# Altium PCB Evaluation_PCB.PcbDoc
Units mm, origin at the board's own origin, x right, y up, seen from the top; angles counter-clockwise.
Board outline 50 x 50 mm, 2 copper layers (Top Layer, Bottom Layer); 22 components, 13 nets, 51 pads, 0 vias.
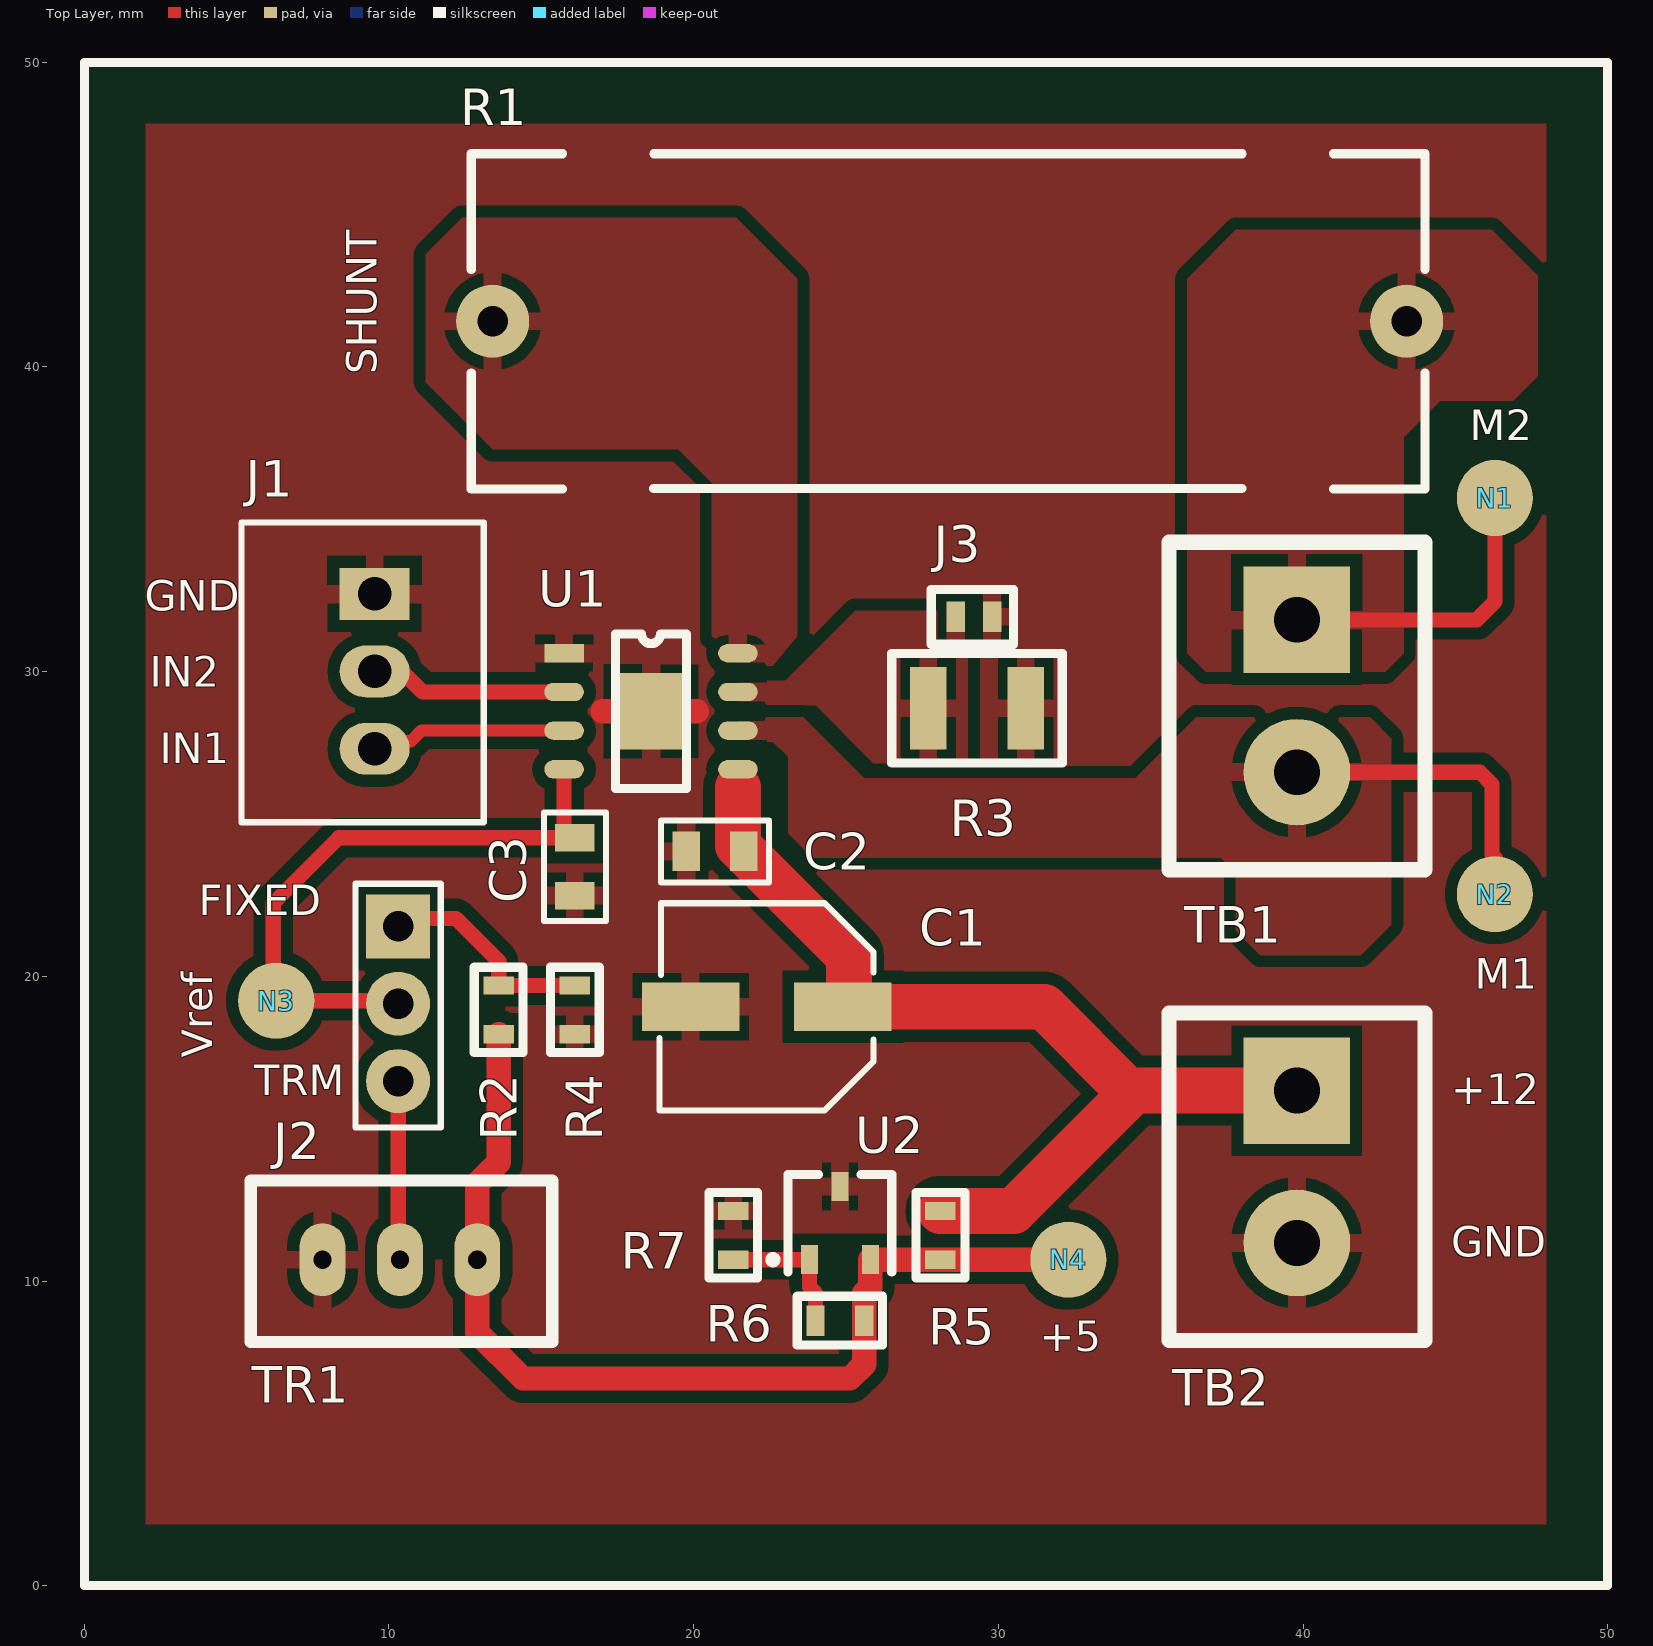
[diagram p0: Top Layer view]
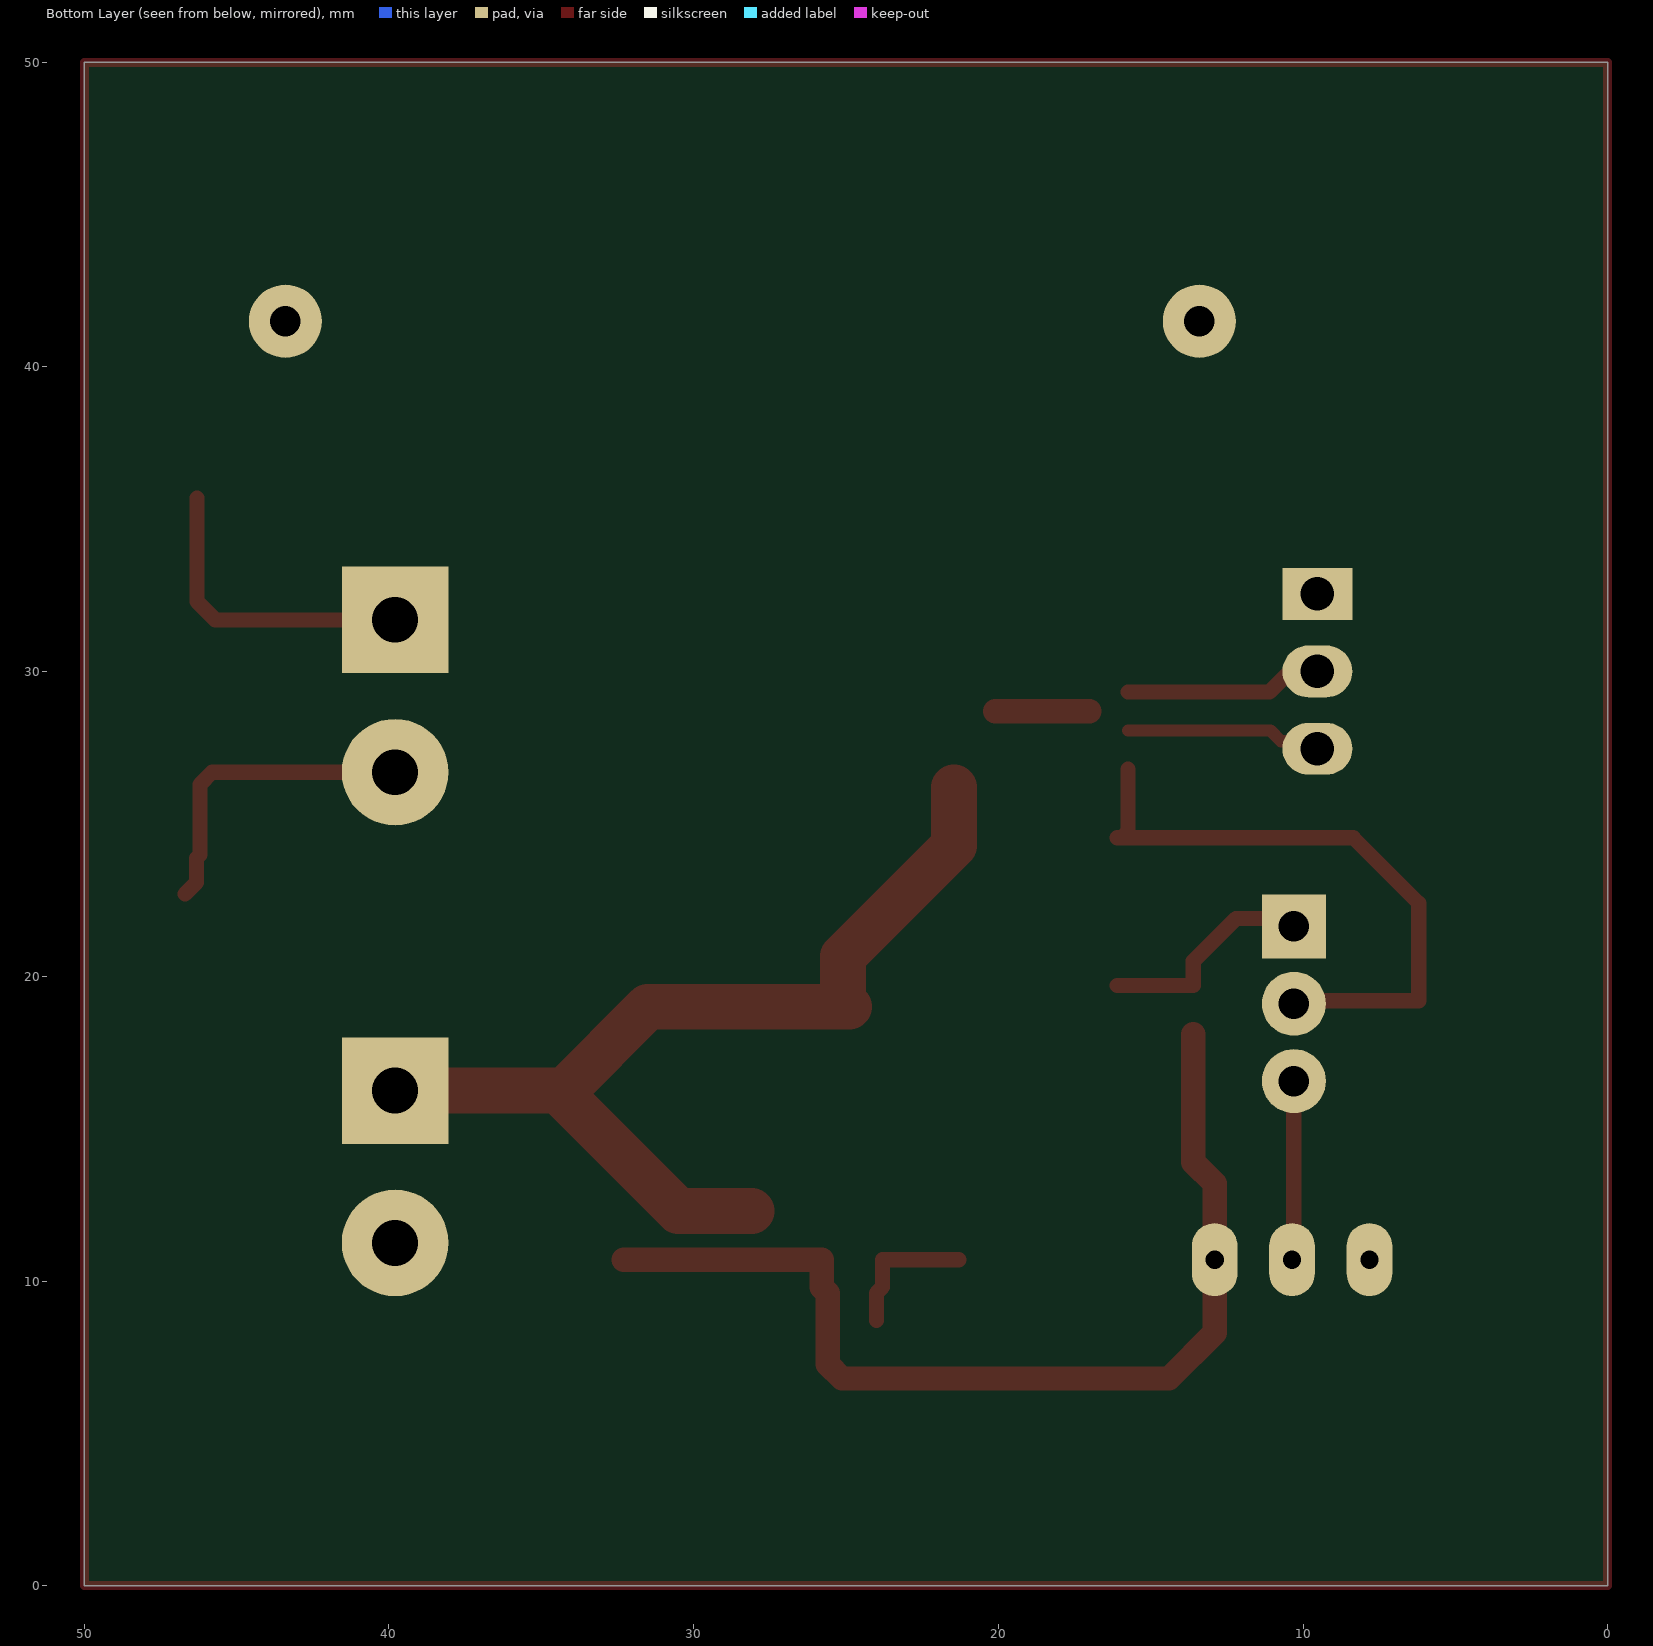
[diagram p1: Bottom Layer view, seen from below]
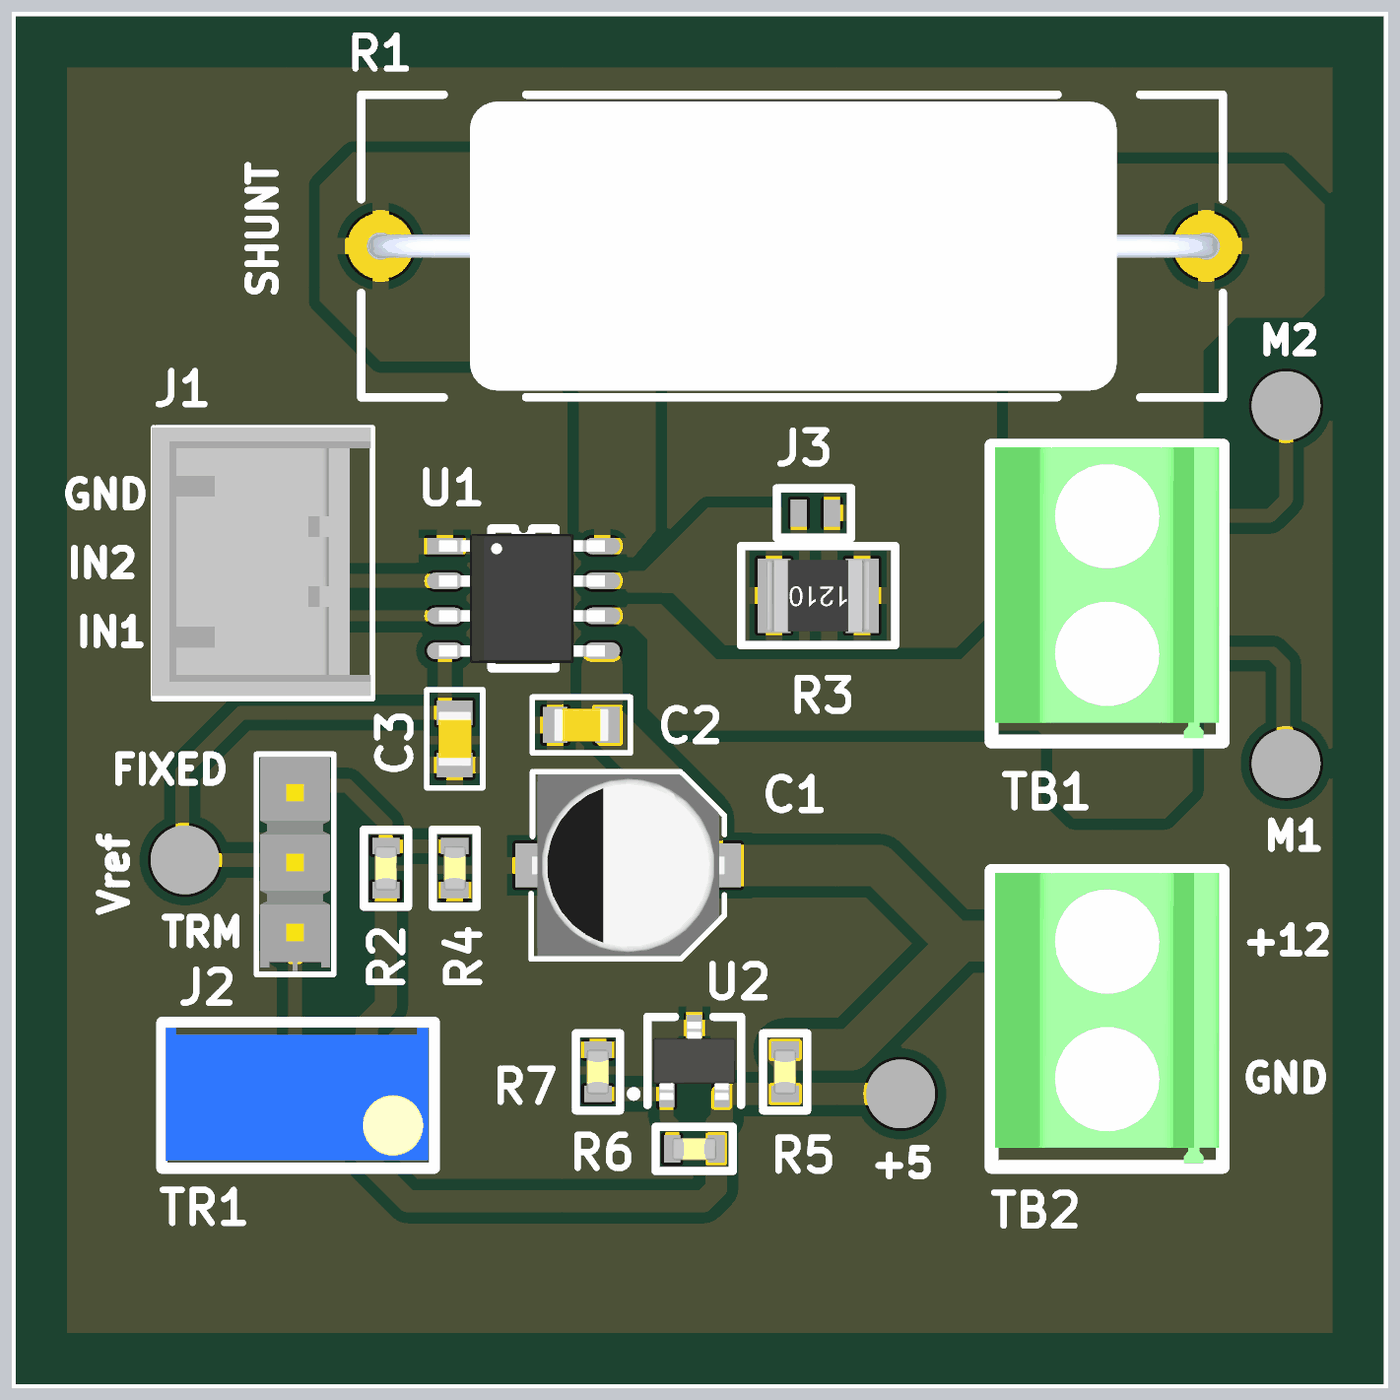
[diagram p2: 3D render of the assembled board from above, using the file's embedded part models]

## Layer stack, top to bottom
Top Solder: solder mask 0.0102, Solder Resist, Dk 3.5
Top Layer: signal copper 0.0356
Dielectric 1: dielectric 0.32, FR-4, Dk 4.8
Bottom Layer: signal copper 0.0356
Bottom Solder: solder mask 0.0102, Solder Resist, Dk 3.5

## Board outline
0,0 50,0 50,50 0,50

## Design rules (kind name [scope] priority, off if disabled: settings)
BoardOutlineClearance [All] p1: gap=2 ignorepadtopadclearanceinfootprint=FALSE
Clearance [All] p1: gap=0.4 ignorepadtopadclearanceinfootprint=FALSE
PolygonConnect [All] p1: thpad.connectstyle=Relief thpad.reliefconductorwidth=0.6 thpad.reliefentries=4 thpad.polygonreliefangle="90 Angle" thpad.airgapwidth=0.4 smdpad.connectstyle=Relief smdpad.reliefconductorwidth=0.6 smdpad.reliefentries=4 smdpad.polygonreliefangle="90 Angle" smdpad.airgapwidth=0.3 via.connectstyle=Relief via.reliefconductorwidth=0.254 via.reliefentries=4 via.polygonreliefangle="90 Angle" via.airgapwidth=0.254
RoutingVias [All] p1: holewidth=0.711 width=1.27 viastyle="Through Hole" minholewidth=0.711 minwidth=1.27 maxholewidth=0.711 maxwidth=1.27
SolderMaskExpansion [All] p1: expansion=0.102 istentingtop=FALSE
Width [All] p1: maxlimit=3 minlimit=0.4 preferedwidth=0.5
30 further rules are at their usual default settings.

## Components (designator, comment, footprint, x,y, rotation, side; value= is the part's Value field where it differs from the comment)
C1 "100u / 10V" C_ALUM_D_SIZE 22.4,19 r180 top
C2 "1uF / 25 V" "C0805 - 0.1uf" 20.7,24.1 r0 top
C3 "0805_100n" "C0805 - 0.1uf" 16.1,23.6 r90 top
J1 "Data HDR 1x3 2.54mm" DHDR_1x3_2.54mm 9.529,26.2 r0 top
J2 "HDR 1x3" "HDR 1x3 2.54mm" 10.3,21.64 r0 top
J3 "Jumper Pads" JMP 29.8,31.8 r180 top
N1 "Test Node" "TEST NODE" 46.3,35.7 r0 top
N2 "Test Node" "TEST NODE" 46.3,22.7 r0 top
N3 "Test Node" "TEST NODE" 6.3,19.2 r0 top
N4 "Test Node" "TEST NODE" 32.3,10.7 r270 top
R1 "_R" 5WATT_RESISTOR 28.4,41.5 r0 top
R2 "0603_R" 0603_CAP 13.6,19.7 r270 top
R3 "1210_R" 1210_R 30.9,28.8 r180 top
R4 "0603_R" 0603_CAP 16.1,18.1 r90 top
R5 "0603_R" 0603_CAP 28.1,12.3 r270 top
R6 "0603_R" 0603_CAP 24,8.7 r0 top
R7 "0603_R" 0603_CAP 21.3,12.3 r270 top
TB1 "TERM 1x2 5mm" Terminal_5mm 39.8,29.2 r0 top
TB2 "TERM 1x2 5mm" Terminal_5mm 39.8,13.75 r0 top
TR1 "Trimmer_R" 3296W_TRIMMER 10.36,10.7 r0 top
U1 "3.5A Motor Driver" HSOP8 18.6,28.7 r0 top
U2 "TL431" SO-23 24.8,11.9 r0 top

## Footprints (in the part's own frame and the unit in brackets; to place one, negate y for a bottom-side part, rotate by r counter-clockwise, add the part's x,y. Pads: shape width x height; smd on the part's side, far side on the other; paste and mask are expansions set on the pad)
5WATT_RESISTOR [mm]
  round 2.4 hole 1: 1(-15,0) 2(15,0)
  silkscreen extent -15.7,-5.5 15.6,5.5, body extent -15.43,-5.25 15.43,5.25, height 10
0603_CAP [mm]
  rect 0.6x1 smd: 1(0,0) 2(1.6,0)
  silkscreen extent -0.6,-0.8 2.2,0.8, body extent 0,-0.4 1.6,0.4, height 0.81
1210_R [mm]
  rect 1.2x2.7 smd: 1(0,0) 2(3.2,0)
  silkscreen extent -1.2,-1.8 4.4,1.8, body extent -0.25,-1.3 3.45,1.3, height 0.51
3296W_TRIMMER [mm]
  oval 1.5x2.4 hole 0.6: 1(2.54,0) 2(-2.54,0) 3(0,0)
  silkscreen extent -4.9,-2.7 5,2.6, body extent -4.76,-2.41 4.76,2.41, height 11.55
"C0805 - 0.1uf" [mm]
  rect 0.9x1.3 smd: 1(-0.95,0) 2(0.95,0)
  silkscreen extent -1.78,-1.02 1.78,1.02, body extent -1,-0.6 1,0.6, height 0.96
C_ALUM_D_SIZE [mm]
  rect 3.2x1.6 smd: 1(-2.5,0) 2(2.5,0)
  silkscreen extent -3.5,-3.4 3.52,3.4, body extent -3.5,-3.3 3.5,3.3, height 5.41
DHDR_1x3_2.54mm [mm]
  rect 2.3x1.7 hole 1.1: 1(0,6.35)
  oval 2.3x1.7 hole 1.1: 2(0,3.81) 3(0,1.27)
  silkscreen extent -4.37,-1.14 3.58,8.7, body extent -4.43,-1.04 3.52,8.71, height 9.66
"HDR 1x3 2.54mm" [mm]
  rect 2.1x2.1 hole 1: 1(0,0)
  round 2.1 hole 1: 2(0,-2.54) 3(0,-5.08)
  silkscreen extent -1.4,-6.6 1.4,1.4, body extent -1.27,-6.48 1.27,1.27, height 8.39
HSOP8 [mm]
  rect 1.3x0.6 smd: 1(-2.854,1.905)
  oval 1.3x0.6 smd: 2(-2.854,0.635) 3(-2.854,-0.635) 4(-2.854,-1.905) 5(2.854,-1.905) 6(2.854,-0.635) 7(2.854,0.635) 8(2.854,1.905)
  rect 2.5x2.5 smd: 9(0,0)
  silkscreen extent -1.17,-2.54 1.17,2.54, body extent -3.07,-2.35 2.95,2.35, height 1.7
JMP [mm]
  rect 0.6x1 smd: 1(0,0) 2(1.2,0)
  silkscreen extent -0.7,-0.9 2,0.9
SO-23 [mm]
  rect 0.56x0.95 smd: 1(-1,-1.2) 2(1,-1.2) 3(0,1.2)
  silkscreen extent -2.3,-1.6 1.7,1.6, body extent -1.5,-1.42 1.5,1.42, height 1.2
Terminal_5mm [mm]
  rect 3.5x3.5 hole 1.5: 1(0,2.5)
  round 3.5 hole 1.5: 2(0,-2.5)
  silkscreen extent -4.2,-5.7 4.2,5.05, body extent -4.08,-5.58 4.07,4.98, height 10.01
"TEST NODE" [mm]
  round 2.5 smd: N(0,0)

## Part data
C1: library part EEE-1AA101WR, "Cap Aluminum 100uF 10V 20% (5 X 5.4mm) SMD 50mA 1000 hr 85°C T/R", Capacitance=100uF, Case/Package=Radial, Manufacturer 1=Panasonic, Max Operating Temperature=85°C, Min Operating Temperature=-40°C, Package Quantity=1, Ripple Current=50mA, Supplier Part Number 1=PCE3867CT-ND, Tolerance=20%, Voltage Rating=10V, ComponentLink1Description=https://datasheet.ciiva.com/26945/getdatasheetpartid-169213-26945071.pdf?src-supplier=Verical, ComponentLink1URL=https://datasheet.ciiva.com/26945/getdatasheetpartid-169213-26945071.pdf?src-supplier=Verical, ComponentLink2Description=https://datasheet.ciiva.com/2983/aba0000ce2-2983906.pdf?src-supplier=Avnet, ComponentLink2URL=https://datasheet.ciiva.com/2983/aba0000ce2-2983906.pdf?src-supplier=Avnet, ComponentLink3Description=https://datasheet.ciiva.com/30075/11aba0000ce2-30075303.pdf?src-supplier=Onlinecomponents.com, ComponentLink3URL=https://datasheet.ciiva.com/30075/11aba0000ce2-30075303.pdf?src-supplier=Onlinecomponents.com, ComponentLink4Description=https://datasheet.ciiva.com/16427/aba0000ce2-16427544.pdf?src-supplier=Future+Electronics, ComponentLink4URL=https://datasheet.ciiva.com/16427/aba0000ce2-16427544.pdf?src-supplier=Future+Electronics, ComponentLink5Description=https://datasheet.ciiva.com/14598/70255710-14598233.pdf?src-supplier=Allied+Electronics, ComponentLink5URL=https://datasheet.ciiva.com/14598/70255710-14598233.pdf?src-supplier=Allied+Electronics, ComponentLink6Description=https://datasheet.ciiva.com/14605/70255710-14605689.pdf?src-supplier=Allied+Electronics, ComponentLink6URL=https://datasheet.ciiva.com/14605/70255710-14605689.pdf?src-supplier=Allied+Electronics, ComponentLink7Description=https://datasheet.ciiva.com/11673/aba0000ce2-11673882.pdf?src-supplier=Avnet, ComponentLink7URL=https://datasheet.ciiva.com/11673/aba0000ce2-11673882.pdf?src-supplier=Avnet, ComponentLink8Description=https://datasheet.ciiva.com/24027/aba0000ce2-40801-24027541.pdf?src-supplier=Mouser, ComponentLink8URL=https://datasheet.ciiva.com/24027/aba0000ce2-40801-24027541.pdf?src-supplier=Mouser, Contact Plating=Tin, Diameter=5mm, Height=5.4mm, Height - Seated (Max)=0.213inch, Lead Free="Lead Free", Length=5.5mm, Life (Hours)=1000Hour, Manufacturer Part Number 1=EEE-1AA101WR, Mount="Surface Mount,PCB", Parameter Name 1="Tape and Reel", Pricing 1="1=0.34000, 10=0.23100, 50=0.15400, 100=0.13090, 500=0.09240 (USD)", Radiation Hardening=No, REACH SVHC=Unknown, Ripple Current (AC)=50mA, RoHS=Yes, Stock 1=0, Supplier 1=Digi-Key, Termination=SMD/SMT, Voltage Rating (DC)=10V
C2 C3: library part C2012X5R1E105K125AA, "TDK - C2012X5R1E105K125AA - SMD Multilayer Ceramic Capacitor, 1 µF, 25 V, 0805 [2012 Metric], ± 10%, X5R, C Series", Capacitance=1uF, Case Code (Imperial)=0805, Case Code (Metric)=2012, Dielectric=X5R, Dielectric Material=Ceramic, Manufacturer 1=TDK, Max Operating Temperature=85°C, Min Operating Temperature=-55°C, Package Quantity=2000, Supplier Part Number 1=445-1419-1-ND, Tolerance=10%, Voltage=25V, Case/Package=0805, ComponentLink1Description=https://datasheet.ciiva.com/11787/0900766b80c1bb00-11787608.pdf?src-supplier=RSComponents, ComponentLink1URL=https://datasheet.ciiva.com/11787/0900766b80c1bb00-11787608.pdf?src-supplier=RSComponents, ComponentLink2Description=https://datasheet.ciiva.com/16449/e412-c-16449595.pdf?src-supplier=Future+Electronics, ComponentLink2URL=https://datasheet.ciiva.com/16449/e412-c-16449595.pdf?src-supplier=Future+Electronics, ComponentLink3Description=https://datasheet.ciiva.com/28602/1744655-28602171.pdf?src-supplier=Element14, ComponentLink3URL=https://datasheet.ciiva.com/28602/1744655-28602171.pdf?src-supplier=Element14, ComponentLink4Description=https://datasheet.ciiva.com/15192/getdatasheetpartid-726707-15192140.pdf?src-supplier=Verical, ComponentLink4URL=https://datasheet.ciiva.com/15192/getdatasheetpartid-726707-15192140.pdf?src-supplier=Verical, Depth=1.25mm, Height=1.25mm, Lead Free="Lead Free", Length=2mm, Manufacturer Part Number 1=C2012X5R1E105K125AA, Mount="Surface Mount", Number of Pins=2, Parameter Name 1="Tape and Reel", Pricing 1="1=0.23000, 10=0.15800, 50=0.09500, 100=0.08030, 500=0.05492, 1000=0.04858 (USD)", Radiation Hardening=No, REACH SVHC="No SVHC", Resistor Type=Ceramic, RoHS=Yes, Stock 1=16168, Supplier 1=Digi-Key, Termination=SMD/SMT, Thickness=0.057inch, Voltage Rating=25V, Voltage Rating (DC)=25V, Weight=0.000194oz, Width=0.049inch
J1: library part "3-Pin Data Connector", "03P MTA100 SHRD HDR,W/O PEG SN", Color=Black, Contact Current Rating=5A, Contact Resistance=6mR, Flammability Rating="UL94 V-0", Manufacturer 1="TE Connectivity", Manufacturer Part Number 1=2-644861-3, Max Operating Temperature=221°C, Max Voltage Rating (AC)=250V, Min Operating Temperature=-67°C, Package Quantity=500, Approvals=CSA, Backwall/Post Interruptions="No (Without)", ComponentLink1Description=https://datasheet.ciiva.com/709/eng-cd-644861-n-basefilename-709776.pdf?src-supplier=Digi-Key, ComponentLink1URL=https://datasheet.ciiva.com/709/eng-cd-644861-n-basefilename-709776.pdf?src-supplier=Digi-Key, ComponentLink2Description=https://datasheet.ciiva.com/19463/911331-19463444.pdf?src-supplier=Jameco, ComponentLink2URL=https://datasheet.ciiva.com/19463/911331-19463444.pdf?src-supplier=Jameco, ComponentLink3Description=https://datasheet.ciiva.com/30493/0900766b80f915a0-30493286.pdf?src-supplier=RSComponents, ComponentLink3URL=https://datasheet.ciiva.com/30493/0900766b80f915a0-30493286.pdf?src-supplier=RSComponents, ComponentLink4Description=https://datasheet.ciiva.com/16684/eng-ds-82056-mta-0608-16684920.pdf?src-supplier=Avnet+Europe, ComponentLink4URL=https://datasheet.ciiva.com/16684/eng-ds-82056-mta-0608-16684920.pdf?src-supplier=Avnet+Europe, ComponentLink5Description=https://datasheet.ciiva.com/30195/8852eng-ds-82056-mta-0608-30195592.pdf?src-supplier=Onlinecomponents.com, ComponentLink5URL=https://datasheet.ciiva.com/30195/8852eng-ds-82056-mta-0608-30195592.pdf?src-supplier=Onlinecomponents.com, ComponentLink6Description=https://datasheet.ciiva.com/16374/2-644861-3-16374442.pdf?src-supplier=Future+Electronics, ComponentLink6URL=https://datasheet.ciiva.com/16374/2-644861-3-16374442.pdf?src-supplier=Future+Electronics, Connector System=Wire-to-Board, Connector Type=Plug,Header,Pin, Contact Gender=Male, Contact Material="Copper Alloy", Contact Mating Length=5.1mm, Contact Plating=Tin,Matte, Contact Post Length=3.56mm, Contact Retention="No (Without)", Contact Shape=Square, Contact Style=Straight, Current Rating=5A, Depth=7.95mm, ELV=Compliant, Fastening Type=Friction, Gender=Male, Height=10.41mm, Housing Color=Black, Housing Material=Polyester, Lead Free="Lead Free", Length=9.75mm, Mating Alignment="Yes (With)", Mating Retention="Yes (With)", Mount="Through Hole", Number of Contacts=3, Number of Positions=3, Number of Rows=1, Orientation=Straight, Packaging=Bag, PCB Mount Alignment="No (Without)", PCB Mount Retention=Without, PCB Mounting Orientation=Vertical, PCB Thickness=0.063inch, Pitch=2.54mm, Plating Thickness=6.3um, Pricing 1="1=0.51000, 10=0.48000, 100=0.36770, 500=0.31978, 1000=0.26382, 5000=0.23184, 10000=0.21585 (USD)", Radiation Hardening=No, REACH SVHC=Unknown, RoHS=Yes, Sealable="No (Without)", Shrouded="Yes (With)", Stock 1=12064, Strain Relief="No (Without)", Supplier 1=Digi-Key, Tail Length=3.56mm, Termination=Solder, Underplate Material=Nickel, Voltage Rating=250V, Voltage Rating (AC)=250V
J2: "1x3 Male Header 2.54 mm pitch"
R1: library part "5W Resistor"
R2 R4 R5 R6 R7: library part "0603 Resistor"
R3: library part "1210 Resistor"
TB1 TB2: library part "Terminal BLK Green", "PHOENIX CONTACT         MKDSN 1,5/ 2             Wire-To-Board Terminal Block, 5 mm, 2 Ways, 26 AWG, 16 AWG, 1.5 mm, Screw", Color=Green, Current=10A, Current Rating=13.5A, Flammability Rating="UL94 V-0", Manufacturer 1="Phoenix Contact", Manufacturer Part Number 1=1729018, Max Supply Voltage=250V, Package Quantity=50, Supplier Part Number 1=651-1729018, Voltage=300V, Voltage Rating=400V, Approvals=UL,CSA,cULus,CB, ComponentLink1Description=https://datasheet.ciiva.com/16071/1729018-16071814.pdf?src-supplier=Onlinecomponents.com, ComponentLink1URL=https://datasheet.ciiva.com/16071/1729018-16071814.pdf?src-supplier=Onlinecomponents.com, ComponentLink2Description=https://datasheet.ciiva.com/832/1729018-832055.pdf?src-supplier=Digi-Key, ComponentLink2URL=https://datasheet.ciiva.com/832/1729018-832055.pdf?src-supplier=Digi-Key, ComponentLink3Description=https://datasheet.ciiva.com/15169/getdatasheetpartid-177860-15169643.pdf?src-supplier=Verical, ComponentLink3URL=https://datasheet.ciiva.com/15169/getdatasheetpartid-177860-15169643.pdf?src-supplier=Verical, ComponentLink4Description=https://datasheet.ciiva.com/14607/70054375-14607356.pdf?src-supplier=Allied+Electronics, ComponentLink4URL=https://datasheet.ciiva.com/14607/70054375-14607356.pdf?src-supplier=Allied+Electronics, ComponentLink5Description=https://datasheet.ciiva.com/33105/1729018-33105978.pdf?src-supplier=Today+Components, ComponentLink5URL=https://datasheet.ciiva.com/33105/1729018-33105978.pdf?src-supplier=Today+Components, Connector Type=Screw, Contact Material=Tin, Depth=8.1mm, Gender=Male, Height=13.5mm, Housing Color=Green, Housing Material=Polyamide, Insulation Material=Nylon, Lead Free="Lead Free", Length=8.1mm, Material=Polyamide, Max Current Rating=13.5A, Mount="Through Hole", Number of Circuits=2, Number of Contacts=2, Number of Levels=1, Number of Pins=2, Number of Poles=2, Number of Positions=2, Number of Positions Per Level=2, Number of Rows=1, Orientation=Straight, Parameter Name 1=Bulk, Pitch=5mm, Pricing 1="1=1.10000, 10=1.05000, 50=1.01000, 100=0.97400, 250=0.91000, 500=0.83800 (USD)", Radiation Hardening=No, REACH SVHC=Unknown, RoHS=Yes, Stock 1=6371, Stripping Length=6mm, Supplier 1=Mouser, Termination=Screw, Weight=0.06949oz, Width=13.5mm, Wire Gauge (Max)=26AWG, Wire Gauge (Min)=26AWG, Wire/Cable Gauge=26AWG
TR1: library part "Blue Trimmer Pot (Small)"
U1: library part TB67H450FNG
U2: "SMD Voltage References SOT-23"

## Nets (pads, with @x,y where several pads share a name; then routed paths per layer and width w, separated by ;. In a path a pad name is that pad's centre, name@x,y a point inside that pad or via, vN(x,y) a via of type N, cw(c..) or ccw(c..) an arc to the next point about the centre after c; other vN are vias at no path point)
+5: N4.N R2.2 R5.2 R6.2 TR1.1 U2.2 | length 33.6
  Top Layer w0.8: R2.2 13.6,13.9 12.9,13.2 TR1.1 12.9,8.3 14.4,6.8 25.131,6.8 25.6,7.269 25.6,9.6 25.8,9.8 U2.2 R5.2 N4.N
+12: C1.1 C2.2 R5.1 TB2.1 U1.5 | length 32.8
  Top Layer w1.5: 21.454,26.2 21.454,24.296 C2.2 25.1,20.65 25.1,19.05 C1.1@25.05,19 ; C1.1 C1.1@25.05,19 ; R5.1 30.506,12.3 34.053,15.847 34.456,16.25 ; TB2.1 34.456,16.25 ; C1.1@25.05,19 31.5,19 34.25,16.25 34.456,16.25
Fixed_Vref: J2.1 R2.1 R4.2 | length 7.3
  Top Layer w0.5: J2.1 10.56,21.9 12.2,21.9 13.6,20.5 R2.1 R4.2
GND: C1.2 C2.1 C3.1 J1.1 J3.1 R3.1 R4.1 R7.1 TB2.2 TR1.2 U1.1 U1.9 U2.3 | length 3.1
  Top Layer w0.8: 17.006,28.7 20.1,28.7
In1: J1.3 U1.3 | length 6.5
  Top Layer w0.4: J1.3 9.778,27.719 10.719,27.719 11.065,28.065 U1.3 ; J1.3@9.6,27.67 J1.3@9.649,27.719
In2: J1.2 U1.2 | length 6.5
  Top Layer w0.5: J1.2@9.6,30.21 10.225,30.21 11.1,29.335 U1.2
NetR6_1: R6.1 R7.2 U2.1 | length 4.6
  Top Layer w0.5: R7.2 U2.1 23.8,9.8 24,9.6 R6.1
Out1: N2.N TB1.2 U1.6 | length 10.4
  Top Layer w0.5: TB1.2 45.8,26.7 46.2,26.3 46.2,23.993 46.317,23.876 46.317,23.083 N2.N@46.7,22.7
Out2: R1.1 U1.8
Out2_R: N1.N R1.2 TB1.1 | length 10.2
  Top Layer w0.5: TB1.1@39.7,31.7 45.7,31.7 46.3,32.3 N1.N
RS: J3.2 R3.2 U1.7
Var_Vref: J2.3 TR1.3 | length 6.3
  Top Layer w0.5: TR1.3@10.3,10.661 J2.3@10.3,16.96
Vref: C3.2 J2.2 N3.N U1.4 | length 20.4
  Top Layer w0.5: N3.N@6.2,19.2 6.2,22.4 8.35,24.55 15.746,24.55 C3.2@15.946,24.55 ; N3.N 10.2,19.2 J2.2 ; U1.4 15.746,24.75 C3.2@15.946,24.55 ; C3.2 C3.2@15.946,24.55
copper on no net: | length 200
  Top Layer w0.3: 0,0 0,50 50,50 50,0 0,0

## Polygon pours and split planes (outlines as drawn)
Out2 on Top Layer "OUT2_L01_P007" (solid, pour order 7): 22.6,30.2 20.9,30.2 20.6,30.5 20.6,36.2 19.5,37.3 13.4,37.3 11.2,39.5 11.2,43.7 12.4,44.9 21.4,44.9 23.4,42.9 23.4,31.16
Out1 on Top Layer "OUT1_L01_P000" (solid, pour order 0): 21.5,27.7 22.6,27.7 23.1,27.2 23.1,24.7 23.9,23.9 37.3,23.9 37.8,23.4 37.8,21.5 38.6,20.7 41.9,20.7 42.9,21.7 42.9,27.8 42.2,28.5 36.5,28.5 34.5,26.5 25.6,26.5 23.6,28.5 21.5,28.5
RS on Top Layer "RS_L01_P002" (solid, pour order 2): 21.4,29.7 23,29.7 25.3,32 28.2,32 29,31.2 29,27 25.9,27 24,28.9 21.4,28.9
Out2_R on Top Layer "OUT2_R_L01_P008" (solid, pour order 8): 42.7,30 36.8,30 36.2,30.6 36.2,42.9 37.8,44.5 46.2,44.5 47.7,43 47.7,39.7 46.9,38.9 44.5,38.9 43.3,37.7 43.3,30.6
GND on Top Layer "GND_L01_P009" (solid, pour order 9): 16.9,34 16.9,23.7 14.6,23.7 14.6,21.5 18.3,21.5 20.2,21.5 20.2,34
GND on Top Layer "GND_L01_P011" (solid, pour order 11): 29.5,33.333 29.5,27 34.2,27 34.9,27.7 34.9,33.3 34.4,33.8 29.9,33.8
GND on Top Layer "GND_L01_P015" (solid, remove dead copper, pour order 15): 0,0 0,50 50,50 50,0

## Other copper
Top Layer:
  pour cut-out: 11.2,11.5 11.2,10.7 11.9,10.7 11.9,11.5
  pour cut-out: 24.2,11.575 24.2,8.8 25.4,8.8 25.4,11.575

## Silkscreen, mask and mechanical layers (free items; w line width, h text height)
Top Overlay:
  the board outline again, w0.3
  text "SHUNT" at 9.6,39.767 h1 r90
  text "M2" at 45.467,37.6 h1
  text "GND" at 1.984,32 h1
  text "IN2" at 2.15,29.5 h1
  text "IN1" at 2.484,27 h1
  text "FIXED" at 3.751,22 h1
  text "M1" at 45.634,19.6 h1
  text "Vref" at 4.2,17.334 h1 r90
  text "TRM" at 5.583,16.1 h1
  text "+12" at 44.867,15.8 h1
  text "GND" at 44.867,10.8 h1
  text "+5" at 31.367,7.7 h1